# Altium PCB ALLPRINT-CAPBOARD-677512.PcbDoc (part 3 of 3)
Units mm, origin at the board's own origin, x right, y up, seen from the top; angles counter-clockwise.
Board outline 105 x 100 mm, 4 copper layers (Top Layer, Layer 1, Layer 2, Bottom Layer), stack 1.586 mm thick; 295 components, 219 nets, 882 pads, 764 vias.
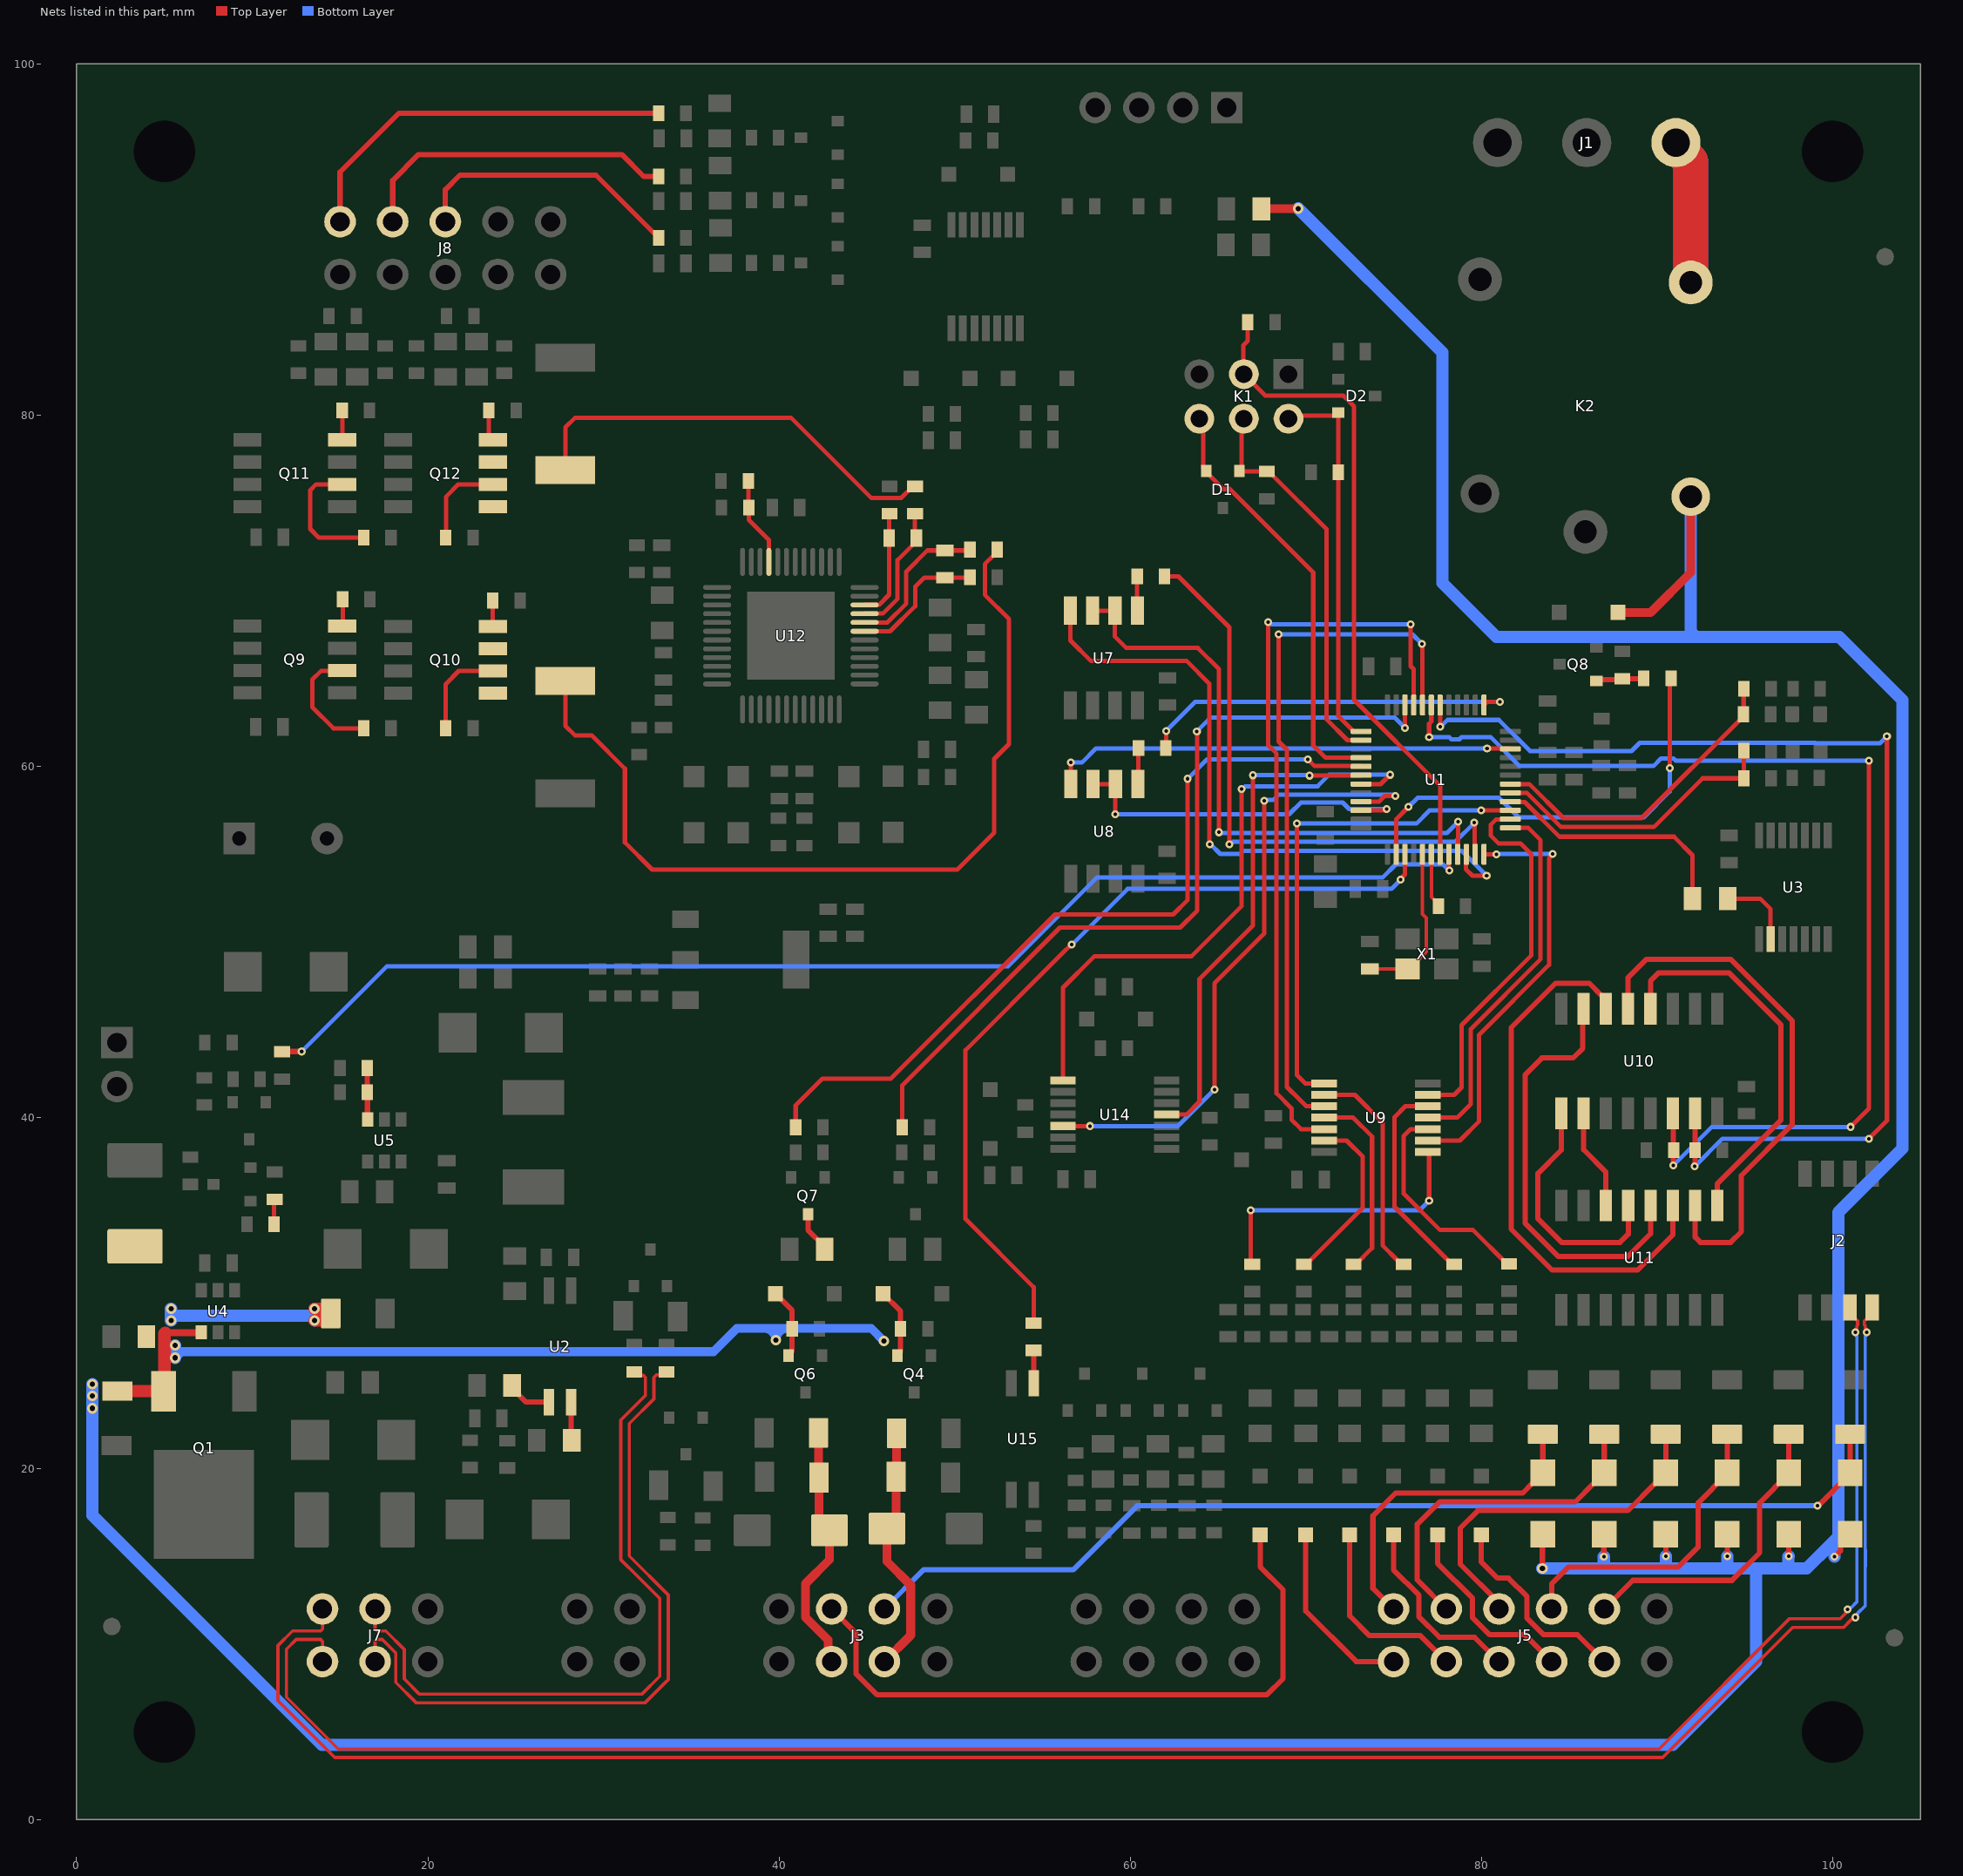
[diagram p5: the nets of this part, all layers, seen from the top]

## Via types
v1: diameter 0.45, hole 0.2, Top Layer to Bottom Layer, tented both sides, 591 vias
v2: diameter 0.6, hole 0.3, Top Layer to Bottom Layer, tented both sides, 173 vias

## Nets (pads, with @x,y where several pads share a name; then routed paths per layer and width w, separated by ;. In a path a pad name is that pad's centre, name@x,y a point inside that pad or via, vN(x,y) a via of type N, cw(c..) or ccw(c..) an arc to the next point about the centre after c; other vN are vias at no path point) (continued)
NetQ7_3: Q7.3 R41.2 | length 2.4
  Top Layer w0.3: Q7.3@41.65,34.475 41.65,33.575 42.6,32.625 R41.2@42.6,32.475
NetQ8_1: Q8.1 R44.2 R45.1 | length 2.8
  Top Layer w0.3: Q8.1@86.55,64.85 86.612,64.912 87.962,64.912 R45.1@88.025,64.975 89.225,64.975 R44.2@89.25,65
NetQ9_2: Q9.2 R62.2 | length 6.9
  Top Layer w0.25: Q9.2@15.125,65.44 15.11,65.425 13.925,65.425 13.425,64.925 13.425,63.35 14.625,62.15 R62.2@16.35,62.15
NetQ9_4: Q9.4 R63.1 | length 1.5
  Top Layer w0.25: Q9.4@15.125,67.98 15.15,68.005 R63.1@15.15,69.5
NetQ10_1: Q10.1 Q10.3 R72.2 R73.2 | length 51
  Top Layer w0.25: R73.2@27.831,64.85 27.831,62.294 28.375,61.75 29.325,61.75 31.225,59.85 31.225,55.65 32.775,54.1 50.15,54.1 52.25,56.2 52.25,60.4 53.1,61.25 53.1,68.375 51.725,69.75 51.725,71.5 52.225,72 52.425,72.2 R72.2@52.425,72.325
NetQ10_2: Q10.2 R70.2 | length 5.5
  Top Layer w0.25: R70.2@21.025,62.15 21.025,64.675 21.765,65.415 Q10.2@23.706,65.415
NetQ10_4: Q10.4 R71.1 | length 1.5
  Top Layer w0.25: R71.1@23.7,69.425 23.7,67.961 Q10.4@23.706,67.955
NetQ11_2: Q11.2 R79.2 | length 7.4
  Top Layer w0.25: Q11.2@15.125,76.04 13.64,76.04 13.3,75.7 13.3,73.5 13.8,73 R79.2@16.35,73
NetQ11_4: Q11.4 R80.1 | length 1.7
  Top Layer w0.25: Q11.4@15.125,78.58 R80.1@15.125,80.25
NetQ12_1: Q12.1 Q12.3 R87.2 R88.2 | length 24.7
  Top Layer w0.25: R88.2@27.831,76.85 27.831,79.281 28.375,79.825 40.7,79.825 45.25,75.275 46.971,75.275 47.621,75.925 R87.2@47.746,75.925
NetQ12_2: Q12.2 R85.2 | length 5.6
  Top Layer w0.25: R85.2@21.05,72.725 21.05,75.35 21.74,76.04 Q12.2@23.706,76.04
NetQ12_4: Q12.4 R86.1 | length 1.8
  Top Layer w0.25: R86.1@23.475,80.25 23.475,78.811 Q12.4@23.706,78.58
NetR3_1: R3.1 R6.2 U1.17 | length 16.8
  Top Layer w0.25: U1.17@81.65,58.475 82.589,58.475 84.539,56.525 89.825,56.525 92.6,59.3 R3.1@94.95,59.3 R6.2@94.95,60.875
NetR4_1: R4.1 R5.1 U1.18 | length 18.1
  Top Layer w0.25: U1.18@81.65,58.975 82.725,58.975 84.675,57.025 89.125,57.025 94.925,62.825 R5.1@94.925,62.95 94.938,62.963 94.938,64.388 R4.1@94.95,64.4
NetR16_1: R16.1 U2.1 | length 2.6
  Top Layer w0.3: R16.1@24.8,24.725 24.8,24.575 25.6,23.775 U2.1@26.89,23.775
NetR18_1: R18.1 U3.2 | length 4.4
  Top Layer w0.25: R18.1@94.025,52.45 95.875,52.45 96.475,51.85 U3.2@96.475,50.15
NetR18_2: R18.2 U1.16 | length 14.1
  Top Layer w0.25: U1.16@81.65,57.975 81.675,57.95 82.475,57.95 84.45,55.975 90.975,55.975 92.025,54.925 R18.2@92.025,52.45
NetR19_2: R19.2 U2.2 | length 2.2
  Top Layer w0.3: U2.2@28.16,23.775 28.16,21.64 R19.2@28.2,21.6
NetR22_1: R22.1 R24.2 U5.3 | length 2.9
  Top Layer w0.3: R22.1@16.55,42.8 R24.2@16.55,41.425 16.563,41.412 16.563,39.887 U5.3@16.575,39.875
NetR26_1: R26.1 R27.2 | length 1.4
  Top Layer w0.25: R27.2@11.25,33.9 11.25,35.3 R26.1@11.275,35.325
NetR28_1: R28.1 U1.8 | length 72
  Top Layer w0.25: U1.8@78.15,54.975 78.163,54.963 78.163,54.063 v1(78.175,54.05)
  Top Layer w0.3: R28.1@11.7,43.725 11.719,43.744 v1(12.815,43.744)
  Bottom Layer w0.25: v1(12.815,43.744) 17.672,48.6 53.05,48.6 58.1,53.65 74.375,53.65 75.125,54.4 77.825,54.4 v1(78.175,54.05)
NetR30_1: R30.1 U1.11 | length 33.5
  Top Layer w0.25: R30.1@61.95,70.8 62.75,70.8 65.65,67.9 v1(65.65,55.55) ; v1(79.6,56.775) 79.625,56.75 79.625,55 U1.11@79.65,54.975 U1.11@79.663,54.963
  Bottom Layer w0.25: v1(65.65,55.55) 65.704,55.55 65.854,55.7 78.525,55.7 v1(79.6,56.775)
NetR30_2: R30.2 U7.1 | length 2
  Top Layer w0.25: R30.2@60.4,70.8 60.4,68.855 U7.1@60.405,68.85
NetR32_1: R32.1 U1.25 | length 21.7
  Top Layer w0.25: R32.1@62.025,61.025 62.075,61.075 62.05,61.1 v1(62.05,62) ; U1.25@80.15,63.475 80.325,63.65 v1(81.05,63.65)
  Bottom Layer w0.25: v1(62.05,62) 63.7,63.65 v1(81.05,63.65)
NetR32_2: R32.2 U8.1 | length 2.1
  Top Layer w0.25: U8.1@60.43,58.975 60.475,59.02 R32.2@60.475,61.025
NetR37_2: R37.2 U1.34 | length 47.2
  Top Layer w0.25: R37.2@47.025,39.425 47.025,41.825 56,50.8 62.85,50.8 63.825,51.775 63.825,61.95 v1(63.8,61.975) ; v1(75.65,62.175) U1.34@75.65,63.475
  Bottom Layer w0.25: v1(63.8,61.975) 64.575,62.75 75.075,62.75 v1(75.65,62.175)
NetR42_2: R42.2 U1.41 | length 45.8
  Top Layer w0.25: R42.2@40.95,39.425 40.95,40.675 42.475,42.2 46.375,42.2 55.725,51.55 62.45,51.55 63.275,52.375 v1(63.275,59.275) ; v1(70.125,60.375) 70.5,60 73.125,60 U1.41@73.15,59.975
  Bottom Layer w0.25: v1(63.275,59.275) 64.375,60.375 v1(70.125,60.375)
NetR44_1: R44.1 U1.2 | length 25.6
  Top Layer w0.25: U1.2@75.15,54.975 75.15,56.975 v1(75.85,57.675) ; v1(90.725,59.875) 90.725,64.925 R44.1@90.8,65
  Bottom Layer w0.25: v1(75.85,57.675) 76.375,58.2 81,58.2 82.125,57.075 89.25,57.075 90.725,58.55 v1(90.725,59.875)
NetR47_2: R47.2 U9.1 | length 16.3
  Top Layer w0.25: v1(66.875,34.7) 66.875,31.705 R47.2@66.955,31.625 ; U9.1@76.95,38.025 77.025,37.95 v1(77.025,35.25)
  Bottom Layer w0.25: v1(66.875,34.7) 76.475,34.7 v1(77.025,35.25)
NetR49_2: R49.2 U9.3 | length 12.5
  Top Layer w0.25: U9.3@76.95,39.325 75.975,39.325 75.575,38.925 75.575,35.65 77.65,33.575 79.525,33.575 81.45,31.65 R49.2@81.575,31.65
NetR51_2: R51.2 U9.5 | length 12
  Top Layer w0.25: U9.5@76.95,40.625 75.675,40.625 75.05,40 75.05,34.9 78.325,31.625 R51.2@78.45,31.625
NetR53_2: R53.2 U9.9 | length 12.6
  Top Layer w0.25: U9.9@71.05,41.275 72.8,41.275 74.375,39.7 74.375,32.7 75.25,31.825 75.45,31.625 R53.2@75.575,31.625
NetR55_2: R55.2 U9.11 | length 11
  Top Layer w0.25: U9.11@71.05,39.975 72.7,39.975 73.775,38.9 73.775,32.55 72.85,31.625 R55.2@72.725,31.625
NetR57_2: R57.2 U9.13 | length 10.2
  Top Layer w0.25: R57.2@69.9,31.625 70.025,31.625 73.25,34.85 73.25,37.75 72.325,38.675 U9.13@71.05,38.675
NetR58_1: R58.1 U1.31 U10.14 | length 63.3
  Top Layer w0.25: v1(77.025,61.65) 77.025,62.403 77.15,62.528 U1.31@77.15,63.475 ; v1(101.025,39.45) 102.075,40.5 v1(102.075,60.3)
  Top Layer w0.3: U10.14@90.9,40.225 90.925,40.2 90.925,38.15 R58.1@90.95,38.125 90.937,38.113 90.937,37.262 v1(90.925,37.25)
  Bottom Layer w0.25: v1(77.025,61.65) 78.172,61.65 78.297,61.525 78.753,61.525 78.878,61.65 80.525,61.65 82.175,60 89.797,60 90.229,60.432 90.724,60.432 90.731,60.439 90.939,60.439 91.078,60.3 v1(102.075,60.3) ; v1(90.925,37.25) 93.125,39.45 v1(101.025,39.45)
NetR59_1: R59.1 U1.30 U10.15 | length 64.9
  Top Layer w0.25: v1(77.65,62.25) U1.30@77.65,63.475 ; v1(102.069,38.775) 103.1,39.806 v1(103.1,61.7)
  Top Layer w0.3: v1(92.15,37.2) 92.163,37.212 92.163,38.113 R59.1@92.175,38.125 92.173,38.128 92.173,40.223 U10.15@92.17,40.225
  Bottom Layer w0.25: v1(77.65,62.25) 77.696,62.25 78.071,62.625 81,62.625 82.775,60.85 88.55,60.85 89.025,61.325 99.016,61.325 99.054,61.288 102.688,61.288 v1(103.1,61.7) ; v1(92.15,37.2) 93.725,38.775 v1(102.069,38.775)
NetR61_1: R61.1 R64.2 U12.21 | length 5.1
  Top Layer w0.25: R61.1@38.25,76.225 38.263,76.213 38.263,74.738 R64.2@38.275,74.725 38.275,74.025 39.425,72.875 U12.21@39.425,71.625
NetR106_1: R106.1 U1.3 | length 47.5
  Top Layer w0.25: R106.1@54.5,28.275 54.5,30.325 50.625,34.2 50.625,43.822 55.803,49 56.125,49.322 56.628,49.825 v1(56.675,49.825) ; v1(75.4,53.525) 75.4,53.579 75.65,53.829 U1.3@75.65,54.975
  Bottom Layer w0.25: v1(56.675,49.825) 59.85,53 74.875,53 v1(75.4,53.525)
NetR106_2: R106.2 U15.1 | length 1.9
  Top Layer w0.3: U15.1@54.5,24.85 R106.2@54.5,26.725
NetU1_9: U1.9 U7.2 U7.3 | length 34.5
  Top Layer w0.25: U7.3@57.865,68.85 U7.2@59.135,68.85 59.135,67.365 59.775,66.725 63.85,66.725 65.05,65.525 v1(65.05,56.225) ; U1.9@78.65,54.975 78.675,55 v1(78.675,56.825)
  Bottom Layer w0.25: v1(65.05,56.225) 65.1,56.175 78.025,56.175 v1(78.675,56.825)
NetU1_10: U1.10 U7.4 | length 38.6
  Top Layer w0.25: U7.4@56.595,68.85 56.595,67.155 57.775,65.975 63.225,65.975 64.5,64.7 64.5,55.575 v1(64.525,55.55) ; U1.10@79.15,54.975 79.125,54.95 79.125,54.117 79.492,53.75 v1(80.3,53.75)
  Bottom Layer w0.25: v1(64.525,55.55) 64.575,55.55 65.125,55 66.275,55 66.45,55.175 78.875,55.175 v1(80.3,53.75)
NetU1_12: U1.12 U9.2 | length 24.2
  Top Layer w0.25: U9.2@76.95,38.675 78.775,38.675 79.875,39.775 79.875,44.7 83.85,48.675 83.85,54.3 83.85,54.746 84.05,54.946 v1(84.05,55) ; U1.12@80.15,54.975 v1(80.85,54.975)
  Bottom Layer w0.25: v1(80.85,54.975) 80.863,54.987 84.038,54.987 v1(84.05,55)
NetU1_13: U1.13 U9.4 | length 21.5
  Top Layer w0.25: U9.4@76.95,39.975 78.625,39.975 79.4,40.75 79.4,45.025 83.375,49 83.375,55.775 82.675,56.475 U1.13@81.65,56.475
NetU1_14: U1.14 U9.6 | length 21.7
  Top Layer w0.25: U9.6@76.95,41.275 78.45,41.275 78.875,41.7 78.875,45.25 82.85,49.225 82.85,54.975 82.225,55.6 80.975,55.6 80.525,56.05 80.525,56.65 80.825,56.95 81.625,56.95 U1.14@81.65,56.975
NetU1_15: U1.15 U9.8 | length 28.5
  Top Layer w0.25: v1(69.5,56.725) 69.5,42.4 69.975,41.925 U9.8@71.05,41.925 ; v1(80,57.475) U1.15@81.65,57.475
  Bottom Layer w0.25: v1(69.5,56.725) 76.3,56.725 77.05,57.475 v1(80,57.475)
NetU1_22: U1.22 U8.4 | length 26.6
  Top Layer w0.25: U8.4@56.62,58.975 56.625,58.98 v1(56.625,60.2) ; v1(80.325,61) 81.625,61 U1.22@81.65,60.975
  Bottom Layer w0.25: v1(56.625,60.2) 57.25,60.2 58.05,61 v1(80.325,61)
NetU1_32: U1.32 U9.10 | length 40.4
  Top Layer w0.25: v1(68.45,67.5) 68.45,61.4 68.925,60.925 68.925,41.725 69.65,41 70.025,40.625 U9.10@71.05,40.625 ; v1(76.625,66.95) 76.637,66.938 76.637,63.488 U1.32@76.65,63.475
  Bottom Layer w0.25: v1(68.45,67.5) 76.075,67.5 v1(76.625,66.95)
NetU1_33: U1.33 U9.12 | length 43.8
  Top Layer w0.25: v1(67.85,68.2) 67.85,61.2 68.338,60.713 68.338,41.363 69.2,40.5 69.2,39.85 69.725,39.325 U9.12@71.05,39.325 ; v1(75.975,68.075) 75.975,65.685 76.15,65.51 U1.33@76.15,63.475
  Bottom Layer w0.25: v1(67.85,68.2) 67.975,68.075 v1(75.975,68.075)
NetU1_42: U1.42 U14.4 | length 28.2
  Top Layer w0.25: U14.4@62.075,40.15 63.202,40.15 63.951,40.899 63.951,47.876 67,50.925 v1(67,59.475) ; v1(70.225,59.45) 70.237,59.462 73.138,59.462 U1.42@73.15,59.475
  Bottom Layer w0.25: v1(67,59.475) 70.2,59.475 v1(70.225,59.45)
NetU1_43: U1.43 U14.8 | length 34.7
  Top Layer w0.25: U14.8@56.175,42.1 56.175,47.375 57.975,49.175 63.5,49.175 66.35,52.025 v1(66.35,58.7) ; U1.43@73.15,58.975 73.163,58.963 74.263,58.963 v1(74.8,59.5)
  Bottom Layer w0.25: v1(66.35,58.7) 66.404,58.7 66.554,58.85 70.675,58.85 71.325,59.5 v1(74.8,59.5)
NetU1_45: U1.45 U14.12 | length 36.8
  Top Layer w0.25: U14.12@56.175,39.5 v1(57.7,39.5) ; v1(64.8,41.575) 64.8,47.625 67.625,50.45 v1(67.625,58.025) ; U1.45@73.15,57.975 74.173,57.975 74.498,58.3 v1(75.1,58.3)
  Bottom Layer w0.25: v1(57.7,39.5) 62.725,39.5 v1(64.8,41.575) ; v1(67.625,58.025) 67.663,58.063 68.152,58.063 68.464,58.375 74.971,58.375 75.046,58.3 v1(75.1,58.3)
NetU1_46: U1.46 U8.2 U8.3 | length 20.4
  Top Layer w0.25: U8.3@57.89,58.975 U8.2@59.16,58.975 59.15,58.965 v1(59.15,57.25) ; U1.46@73.15,57.475 74.471,57.475 74.546,57.55 v1(74.6,57.55)
  Bottom Layer w0.25: v1(59.15,57.25) 69.05,57.25 69.725,57.925 72.097,57.925 72.472,57.55 v1(74.6,57.55)
NetU10_4: U10.4 U11.1 | length 22.2
  Top Layer w0.3: U10.4@89.63,46.169 89.63,47.755 90.1,48.225 94.1,48.225 97.05,45.275 97.05,39.825 93.445,36.22 U11.1@93.445,34.972
NetU10_5: U10.5 U11.2 | length 31
  Top Layer w0.3: U10.5@88.36,46.169 88.36,47.96 89.4,49 94.2,49 97.7,45.5 97.7,39.575 94.8,36.675 94.8,33.475 94.2,32.875 92.475,32.875 92.175,33.175 U11.2@92.175,34.972
NetU10_6: U10.6 U11.3 | length 31.5
  Top Layer w0.3: U10.6@87.09,46.169 87.09,46.719 86.89,46.919 86.856,46.919 86.15,47.625 84.225,47.625 81.7,45.1 81.7,33.625 84.025,31.3 88.9,31.3 90.905,33.305 U11.3@90.905,34.972
NetU10_7: U10.7 U11.4 | length 24.7
  Top Layer w0.3: U10.7@85.82,46.169 85.775,46.124 85.775,43.925 85.225,43.375 83.45,43.375 82.5,42.425 82.5,33.95 84.375,32.075 88.35,32.075 89.635,33.36 U11.4@89.635,34.972
NetU10_9: U10.9 U11.5 | length 14.1
  Top Layer w0.3: U10.9@84.55,40.225 84.55,38.125 83.225,36.8 83.225,34.225 84.575,32.875 87.9,32.875 88.365,33.34 U11.5@88.365,34.972
NetU10_10: U10.10 U11.6 | length 5.8
  Top Layer w0.3: U10.10@85.82,40.225 85.82,38.155 87.095,36.88 U11.6@87.095,34.972
NF0: J1.1 K2.4 | length 16.6
  Top Layer w2: J1.1@91.08,95.5 91.08,95.284 91.925,94.439 K2.4@91.925,87.539
  Bottom Layer w2: J1.1@91.08,95.5 91.08,95.284 91.925,94.439 K2.4@91.925,87.539
O_RS485_N: J2.4 J7.6 | length 119.9
  Top Layer w0.184: J7.6@14,12 14,10.849 13.892,10.742 12.3,10.742 11.466,9.908 11.466,6.772 14.697,3.541 90.325,3.541 97.734,10.95 100.627,10.95 101.081,11.404 101.126,11.404 101.238,11.515 v1(101.31,11.515) ; v1(101.95,27.75) 101.899,27.801 101.899,27.959 101.867,27.991 101.867,28.114 101.812,28.169 101.812,28.399 101.919,28.507 101.966,28.507 102.255,28.796 J2.4@102.255,29.165
  Bottom Layer w0.184: v1(101.31,11.515) 101.31,11.587 101.421,11.699 101.421,11.744 101.867,12.19 101.867,14.425 101.876,14.434 101.876,15.366 101.867,15.375 101.867,27.509 101.899,27.541 101.899,27.699 v1(101.95,27.75)
O_RS485_P: J2.3 J7.3 | length 117.5
  Top Layer w0.184: J7.3@14,9 14,10.151 13.892,10.258 12.5,10.258 11.95,9.708 11.95,6.972 14.897,4.025 90.125,4.025 97.534,11.434 100.426,11.434 100.739,11.746 100.739,11.791 100.85,11.903 v1(100.85,11.975) ; J2.3@100.985,29.165 100.985,28.796 101.274,28.507 101.321,28.507 101.428,28.399 101.428,28.159 101.383,28.114 101.383,27.991 101.351,27.959 101.351,27.801 v1(101.3,27.75)
  Bottom Layer w0.184: v1(100.85,11.975) 100.922,11.975 101.034,12.086 101.079,12.086 101.383,12.391 101.383,14.625 101.392,14.634 101.392,15.166 101.383,15.175 101.383,27.509 101.351,27.541 101.351,27.699 v1(101.3,27.75)
OSC_IN: C10.2 U1.5 X1.1 | length 9.3
  Top Layer w0.2: C10.2@73.65,48.45 X1.1@75.8,48.45 75.9,48.45 76.875,49.425 76.875,51.35 76.65,51.575 U1.5@76.65,54.975
OSC_OUT: R8.2 U1.6 | length 3.1
  Top Layer w0.2: U1.6@77.15,54.975 77.15,52.55 77.55,52.15 R8.2@77.55,52.025
OUT_LED: D12.2 J3.3 PTC7.2 R40.2 | length 14.5
  Top Layer w0.5: PTC7.2@42.25,22.025 42.263,22.012 42.263,19.487 R40.2@42.275,19.475 42.275,17.075 D12.2@42.875,16.475 42.875,14.8 41.5,13.425 41.5,11.525 42.802,10.223 42.802,9.198 J3.3@43,9
OUT_SYNC: D10.2 J3.2 PTC6.2 R35.2 | length 14.4
  Top Layer w0.5: J3.2@46,9 47.5,10.5 47.5,13.35 46.15,14.7 D10.2@46.15,16.575 46.675,17.1 R35.2@46.675,19.525 46.688,19.538 46.688,21.987 PTC6.2@46.7,22
RS485_N: J7.2 PTC3.1 | length 40.5
  Top Layer w0.184: J7.2@17,9 17,10.151 17.108,10.258 17.404,10.258 18.176,9.487 18.176,7.815 19.333,6.658 32.384,6.658 33.55,7.825 33.692,7.966 33.692,12.792 31.475,15.009 31.475,22.55 32.878,23.953 32.878,25.185 33.024,25.332 33.432,25.332 PTC3.1@33.6,25.5
RS485_P: J7.5 PTC2.2 | length 39.6
  Top Layer w0.184: J7.5@17,12 17,10.849 17.108,10.742 17.605,10.742 18.659,9.687 18.659,8.016 18.7,7.975 19.533,7.142 32.183,7.142 33.208,8.167 33.208,12.592 31.929,13.871 30.991,14.809 30.991,22.75 32.394,24.153 32.394,25.185 32.287,25.293 31.957,25.293 PTC2.2@31.75,25.5
RST: K1.3 R14.1 U1.7 | length 37.8
  Top Layer w0.25: R14.1@66.7,85.4 66.7,84.225 66.45,83.975 66.45,82.345 67.695,81.1 72.132,81.1 72.75,80.482 72.75,63.775 77.65,58.875 U1.7@77.65,54.975
SM_ENC_A: J8.3 R78.1 | length 15.9
  Top Layer w0.3: J8.3@21,91 21,92.825 21.825,93.65 29.575,93.65 32.85,90.375 32.975,90.375 33.15,90.2 R78.1@33.15,90.075
SM_ENC_B: J8.2 R84.1 | length 18.6
  Top Layer w0.3: J8.2@18,91 18,93.35 19.475,94.825 31.05,94.825 32.3,93.575 R84.1@33.15,93.575
SM_ENC_Z: J8.1 R93.1 | length 22.4
  Top Layer w0.3: J8.1@15,91 15,93.825 18.35,97.175 R93.1@33.15,97.175
SRAH: C51.2 R72.1 U12.8 | length 8.8
  Top Layer w0.25: U12.8@44.875,68.175 46.175,68.175 47.25,69.25 47.25,71.075 48.45,72.275 C51.2@49.45,72.275 50.825,72.275 R72.1@50.875,72.325
SRAL: C51.1 R74.1 U12.7 | length 7.9
  Top Layer w0.25: U12.7@44.875,67.675 46.325,67.675 47.75,69.1 47.75,70.2 48.275,70.725 C51.1@49.45,70.725 50.85,70.725 R74.1@50.875,70.75
SRBH: C62.2 R87.1 U12.9 | length 7.6
  Top Layer w0.25: U12.9@44.875,68.675 44.881,68.681 45.906,68.681 46.75,69.525 46.75,71.729 47.821,72.8 C62.2@47.821,72.975 47.746,73.05 47.746,74.3 R87.1@47.671,74.375
SRBL: C62.1 R91.1 U12.10 | length 6.3
  Top Layer w0.25: U12.10@44.875,69.175 44.881,69.181 45.698,69.181 46.271,69.753 C62.1@46.271,72.975 46.271,74.325 R91.1@46.221,74.375
SWCLK: D1.1 K1.4 R15.2 U1.38 | length 22.7
  Top Layer w0.25: K1.4@66.475,79.78 66.35,79.655 66.35,76.925 D1.1@66.225,76.8 66.238,76.787 67.763,76.787 67.975,76.575 68.1,76.575 71.175,73.5 71.175,62.675 72.375,61.475 U1.38@73.15,61.475
SWDIO: D2.2 K1.2 R13.1 U1.37 | length 21.9
  Top Layer w0.25: K1.2@69.015,79.78 69.187,79.952 71.677,79.952 D2.2@71.85,80.125 71.862,80.112 71.862,62.838 72.725,61.975 U1.37@73.15,61.975
SWO: D1.2 K1.6 U1.40 | length 24.5
  Top Layer w0.25: K1.6@63.935,79.78 64.15,79.565 64.15,76.975 D1.2@64.325,76.8 64.325,76.75 65.3,75.775 65.675,75.775 70.425,71.025 70.425,61.175 71.125,60.475 U1.40@73.15,60.475
VSYS: C16.2 D9.2 D11.2 D13.2 D20.2 D21.2 D22.2 D23.2 D24.2 D25.2 F2.2 K2.1 PTC1.1 Q1.3 Q4.2 Q6.2 R10.2 R20.2 R34.2 R39.2 U4.4 | length 340.4
  Top Layer w0.3: D11.2@39.8,29.95 40.75,29 R39.2@40.75,27.95 40.75,26.675 40.55,26.475 Q6.2@40.55,26.425 ; D9.2@45.925,29.95 46.925,28.95 R34.2@46.925,27.95 46.925,26.65 46.75,26.475 Q4.2@46.75,26.425 ; v2(83.475,14.3) D25.2@83.475,16.225 ; v1(86.975,14.975) 86.975,16.225 D24.2@87,16.25 ; v1(90.5,15) D23.2@90.5,16.25 ; v1(94,15) D22.2@94,16.25 ; v1(97.5,15) D21.2@97.5,16.25 ; v1(100.117,14.975) 100.453,15.311 100.453,15.703 D20.2@101,16.25
  Top Layer w0.4: 5.05,27.725 5.063,27.738 7.087,27.738 U4.4@7.1,27.75
  Top Layer w0.5: R10.2@67.475,91.725 67.5,91.75 v2(69.575,91.75) ; D13.2@87.775,68.75 89.65,68.75 91.925,71.025 K2.1@91.925,75.339
  Top Layer w0.7: R20.2@2.325,24.4 Q1.3@4.95,24.4 5,24.45 5,27.675 5.05,27.725 ; F2.2@2.925,32.25 F2.2@3.325,32.65 ; v2(13.55,28.425) 14.275,28.425 14.475,28.625 PTC1.1@14.475,28.825 14.475,28.9 14.275,29.1 v2(13.55,29.1) ; D25.2@83.475,16.225 D25.2@83.5,16.25
  Bottom Layer w0.5: v2(5.6,26.303) 5.627,26.303 5.975,26.65 36.275,26.65 37.6,27.975 39.8,27.975 ; 39.15,27.975 cw(c39.15,27.3) v2(39.825,27.3) ; 40.925,27.975 40.5,27.975 ; v2(45.975,27.25) 45.25,27.975 40.5,27.975 ; 39.8,27.975 40.5,27.975 ; 39.8,27.975 39.806,27.969 39.806,27.319 v2(39.825,27.3) ; v2(39.825,27.3) cw(c40.5,27.3) 40.5,27.975
  Bottom Layer w0.7: v2(0.9,24.8) v2(0.9,24.125) v2(0.9,23.425) 0.9,17.325 13.975,4.25 90.9,4.25 95.65,9 95.65,14.3 ; v2(5.375,28.425) v2(5.375,29.1) ; v2(5.6,26.303) v2(5.6,27) ; 5.625,28.7 13.275,28.7 ; v2(13.55,28.425) v2(13.55,29.1) ; v2(69.575,91.75) 77.775,83.55 77.775,70.425 80.85,67.35 91.925,67.35 92.218,67.35 ; v2(83.475,14.3) 86.975,14.3 ; v1(86.975,14.975) 86.975,14.3 ; v1(90.5,15) 90.5,14.3 ; K2.1@91.925,75.339 91.925,67.643 92.218,67.35 ; v1(94,15) 94,14.3 ; v1(97.5,15) 97.475,14.975 97.475,14.325 97.45,14.3 ; v1(100.117,14.975) 100.117,15.308 99.825,15.6 ; 86.975,14.3 90.5,14.3 ; 90.5,14.3 94,14.3 ; 92.218,67.35 100.375,67.35 103.975,63.75 103.975,38.225 100.325,34.575 100.325,16.1 99.825,15.6 ; 94,14.3 95.65,14.3 ; 95.65,14.3 97.45,14.3 ; 97.45,14.3 98.525,14.3 99.825,15.6
X00: D14.2 J3.7 | length 38.2
  Top Layer w0.3: J3.7@43,12 44.385,10.615 44.385,8.315 45.6,7.1 67.775,7.1 68.7,8.025 68.7,13.1 67.4,14.4 D14.2@67.4,16.225
X01: D15.2 J5.2 | length 11.6
  Top Layer w0.3: D15.2@80,16.225 80,14.675 80.925,13.75 81.55,13.75 82.6,12.7 82.6,11.475 83.55,10.525 85.475,10.525 J5.2@87,9
X02: D16.2 J5.3 | length 11.1
  Top Layer w0.3: D16.2@77.5,16.225 77.5,14.6 79.5,12.6 79.5,11.5 80.475,10.525 82.475,10.525 J5.3@84,9
X03: D17.2 J5.4 | length 10.9
  Top Layer w0.3: D17.2@75,16.225 75,14.225 76.45,12.775 76.45,11.55 77.615,10.385 79.615,10.385 J5.4@81,9
X04: D18.2 J5.5 | length 11.2
  Top Layer w0.3: D18.2@72.5,16.225 72.5,11.6 73.625,10.475 76.525,10.475 J5.5@78,9
X05: D19.2 J5.6 | length 10.5
  Top Layer w0.3: D19.2@70,16.225 70,11.875 72.875,9 J5.6@75,9
Y00: D20.1 J3.6 PTC8.2 | length 60.4
  Top Layer w0.3: v1(99.15,17.875) 99.175,17.875 101,19.7 D20.1@101,19.75 PTC8.2@101,21.95
  Bottom Layer w0.3: J3.6@46,12 48.225,14.225 56.75,14.225 60.4,17.875 v1(99.15,17.875)
Y01: D21.1 J5.8 PTC9.2 | length 17.6
  Top Layer w0.3: J5.8@87,12 88.625,13.625 94.275,13.625 95.85,15.2 95.85,18.05 97.5,19.7 D21.1@97.5,19.75 PTC9.2@97.5,21.95
Y02: D22.1 J5.9 PTC10.2 | length 17.8
  Top Layer w0.3: J5.9@84,12 84,13.425 84.95,14.375 91.2,14.375 92.35,15.525 92.35,18.05 94,19.7 PTC10.2@94,21.95
Y03: D23.1 J5.10 PTC11.2 | length 20.7
  Top Layer w0.3: J5.10@81,12 81,12.35 78.8,14.55 78.8,16.6 79.8,17.6 88.35,17.6 89.9,19.15 89.95,19.15 90.5,19.7 D23.1@90.5,19.75 PTC11.2@90.5,21.95
Y04: D24.1 J5.11 PTC12.2 | length 19.6
  Top Layer w0.3: J5.11@78,12 76.35,13.65 76.35,16.825 77.625,18.1 85.35,18.1 86.4,19.15 86.45,19.15 87,19.7 PTC12.2@87,21.95
Y05: D25.1 J5.12 PTC13.2 | length 18.7
  Top Layer w0.3: J5.12@75,12 73.825,13.175 73.825,17.3 75.125,18.6 82.35,18.6 82.9,19.15 82.95,19.15 83.5,19.7 PTC13.2@83.5,21.95
pads on no net: FD1. FD2. FD3. U1.4 U3.4 U3.6 U3.8 U3.10 U3.12 U10.11 U10.12 U10.13 U11.9 U11.10 U12.17 U12.18 U12.26 U12.27

## Polygon pours and split planes (outlines as drawn)
GND on Top Layer "NONET_L01_P-001" (solid, remove dead copper, pour order 37): 32.262,51.662 29.375,54.55 29.375,58.884 29.816,59.325 31.55,59.325 31.55,87.425 29.775,89.2 12.4,89.2 10.775,87.575 10.775,80.3 10.35,79.875 -0.275,79.875 -0.9,80.5 -0.9,98.425 -1.175,98.7 1.25,101.125 104.425,101.125 104.425,-1.4 -0.9,-1.4 -0.9,13.2 -0.875,13.225 19,13.225 20.5,14.725 20.5,31.75 22.65,33.9 29.85,33.9 30.6,34.65 30.6,43.525 32.175,45.1 44.525,45.1 44.925,45.5 44.925,51.025 32.9,51.025
VSYS on Top Layer "NONET_L01_P-001" (solid, remove dead copper, pour order 32): 41.15,29.65 40.225,30.575 39.35,30.575 39.225,30.45 39.225,28.65 39.225,26.95 40.15,26.025 41,26.025 41.15,26.175
VSYS on Top Layer "NONET_L01_P-001" (solid, remove dead copper, pour order 31): 47.25,29.5 46.325,30.425 45.45,30.425 45.325,30.3 45.325,28.5 45.325,26.8 46.25,25.875 47.1,25.875 47.25,26.025
GND on Top Layer "NONET_L01_P-001" (solid, remove dead copper, pour order 14): 13.675,31.3 cw(c13.675,31.85) 13.125,31.85 13.125,41.325 cw(c13.7,41.325) 13.7,41.9 15.275,41.9 cw(c15.275,41.825) 15.35,41.825 15.35,40.15 ccw(c16.135,40.15) 15.58,39.595 16.025,39.15 ccw(c16.568,39.693) 16.568,38.925 20.05,38.925 ccw(c20.05,39.325) 20.45,39.325 20.45,50.25 cw(c20.85,50.25) 20.85,50.65 22.45,50.65 cw(c22.45,50.225) 22.875,50.225 22.875,41.05 cw(c21.427,41.05) 22.451,40.026 21,38.575 cw(c20.517,39.058) 20.517,38.375 16.15,38.375 ccw(c16.15,38.013) 15.894,38.269 15.45,37.825 ccw(c15.631,37.644) 15.375,37.644 15.375,37.35 ccw(c15.918,37.35) 15.534,36.966 15.925,36.575 cw(c15.02,35.67) 16.3,35.67 16.3,31.475 cw(c16.125,31.475) 16.125,31.3
3,3V on Top Layer "NONET_L01_P-001" (solid, remove dead copper, pour order 1): 83.3,60.475 83.3,62.425 83.35,62.475 84.95,62.475 85.525,63.05 87.275,63.05 87.4,62.925 87.4,62.425 87.3,62.325 86.4,62.325 85.775,61.7 85.775,60.475 85.7,60.4 83.375,60.4
GND on Top Layer "NONET_L01_P-001" (solid, remove dead copper, pour order 36): 83.277,58.798 84.775,57.3 88.9,57.3 89.25,57.65 89.25,58.625 89.025,58.85 86.675,58.85 85.982,59.543 83.364,59.543 83.277,59.455
3,3V on Top Layer "NONET_L01_P-001" (solid, remove dead copper, pour order 29): 74.425,53.9 74.65,53.9 74.65,53.675 74.675,53.65 74.675,52.675 74.05,52.675 74.05,53.5 73.6,53.95 70.475,53.95 70.375,54.05 70.375,56.025 70.517,56.167 73.158,56.167 73.75,55.575 73.75,54.575
GND on Top Layer "NONET_L01_P-001" (solid, remove dead copper, pour order 27): 42.825,51.35 41.85,51.35 cw(c41.85,51.75) 41.45,51.75 41.45,52.725 cw(c41.8,52.725) 41.8,53.075 45.375,53.075 cw(c45.375,52.85) 45.6,52.85 45.6,51.675 cw(c45.3,51.675) 45.3,51.375
3,3V on Top Layer "NONET_L01_P-001" (solid, remove dead copper, pour order 24): 37.273,46.777 ccw(c37.7,47.204) 37.7,46.6 44.75,46.6 ccw(c44.75,47.025) 45.175,47.025 45.175,50.5 ccw(c44.875,50.5) 44.875,50.8 38.375,50.8 ccw(c38.375,49.834) 37.692,50.517 37.1,49.925 cw(c36.496,50.529) 36.496,49.675 34.025,49.675 ccw(c34.025,49.475) 33.825,49.475 33.825,48.45 ccw(c34.15,48.45) 34.15,48.125 35.675,48.125 cw(c35.675,47.521) 36.102,47.948
GND on Top Layer "NONET_L01_P-001" (solid, remove dead copper, pour order 18): 31.301,48.025 29.312,48.025 cw(c29.312,48.658) 28.865,48.21 25.43,51.645 ccw(c27.53,53.745) 27.53,50.775 34.911,50.775 cw(c34.911,49.836) 35.575,50.5 33.925,50.5 ccw(c33.925,49.875) 33.3,49.875 33.3,48.35 cw(c32.975,48.35) 32.975,48.025
5V on Top Layer "NONET_L01_P-001" (solid, remove dead copper, pour order 17): 23.75,50.375 23.75,40.45 ccw(c24.225,40.45) 24.225,39.975 27.8,39.975 ccw(c27.8,40.35) 28.175,40.35 28.175,42.18 cw(c29.37,42.18) 28.525,43.025 30.427,44.927 cw(c31.75,43.604) 31.75,45.475 35.175,45.475 ccw(c35.175,46.025) 35.725,46.025 35.725,47.025 ccw(c35.35,47.025) 35.35,47.4 28.389,47.4 cw(c28.389,48.339) 27.725,47.675 25.049,50.351 ccw(c24.75,50.053) 24.75,50.475 23.85,50.475 ccw(c23.85,50.375)
GND on Top Layer "NONET_L01_P-001" (solid, remove dead copper, pour order 16): 20.523,82.723 20.375,82.575 17.225,82.575 17.075,82.723 11.981,82.723 ccw(c11.981,82.117) 11.375,82.117 11.375,75.825 11.375,47.5 ccw(c11.9,47.5) 11.9,46.975 17.725,46.975 ccw(c17.725,47.5) 18.25,47.5 18.25,51.675 cw(c18.7,51.675) 18.7,52.125 24.45,52.125 cw(c24.45,50.918) 25.304,51.771 26.035,51.04 ccw(c27.339,52.344) 27.339,50.5 35.55,50.5 ccw(c35.55,50.625) 35.675,50.625 35.675,52.05 ccw(c35.175,52.05) 35.175,52.55 33,52.55 cw(c33,53.938) 32.018,52.957 30.275,54.7 cw(c30.818,55.243) 30.05,55.243 30.05,59.05 ccw(c29.75,59.05) 29.75,59.35 17.177,59.35 cw(c17.177,61.89) 15.381,60.094 13.075,62.4 cw(c13.497,62.822) 12.9,62.822 12.9,79.3 cw(c14.65,79.3) 14.65,81.05 23.826,81.05 ccw(c23.822,83.341) 25.445,81.723 ccw(c25.102,82.141) 25.484,81.759 26.025,82.3 cw(c26.266,82.059) 26.266,82.4 30.85,82.4 ccw(c30.85,82.7) 31.15,82.7 31.15,85.225 ccw(c30.775,85.225) 30.775,85.6 28.15,85.6 ccw(c28.15,84.635) 27.467,85.317 25.175,83.025 cw(c24.446,83.754) 24.446,82.723
NetC19_1 on Top Layer "NONET_L01_P-001" (solid, remove dead copper, pour order 15): 18.875,37.875 ccw(c20.022,37.875) 19.211,37.064 19.8,36.475 ccw(c20.222,36.897) 20.222,36.3 22.388,36.3 ccw(c22.388,36.812) 22.75,36.45 23.198,36.898 cw(c23.625,36.471) 23.625,37.075 27.75,37.075 cw(c27.75,36.9) 27.925,36.9 27.925,34.975 cw(c27.825,34.975) 27.825,34.875 23.072,34.875 ccw(c23.072,34.278) 22.65,34.7 21.477,33.527 ccw(c21.904,33.1) 21.3,33.1 21.3,31.5 cw(c21.05,31.5) 21.05,31.25 19.05,31.25 cw(c19.05,31.475) 18.825,31.475 18.825,36.098 ccw(c18.398,36.098) 18.7,36.4 18.238,36.862 cw(c18.452,37.075) 18.15,37.075 18.15,37.85 cw(c18.225,37.85) 18.225,37.925 18.825,37.925 cw(c18.825,37.875)
+VM on Top Layer "NONET_L01_P-001" (solid, remove dead copper, pour order 4): 1.425,46.825 cw(c1.425,47.75) 0.5,47.75 0.5,78.4 cw(c1.425,78.4) 1.425,79.325 6.656,79.325 7.962,79.325 10.275,79.325 cw(c10.275,78.9) 10.7,78.9 10.7,47.125 cw(c10.4,47.125) 10.4,46.825
no net on Top Layer "NONET_L01_P-001" (solid, remove dead copper, pour order 35): 83.347,59.39
GND on Top Layer "NONET_L01_P-001" (solid, remove dead copper, pour order 30): 16.2,21.075 ccw(c17.05,21.075) 17.05,20.225 19.675,20.225 ccw(c19.675,20.6) 20.05,20.6 20.05,25.65 ccw(c19.7,25.65) 19.7,26 16.575,26 ccw(c16.575,25.625) 16.2,25.625
no net on Top Layer "NONET_L01_P-001" (solid, remove dead copper, pour order 28): 70.7,56.2
+VM on Top Layer "NONET_L01_P-001" (solid, remove dead copper, pour order 22): 1.7,36.225 cw(c1.7,36.7) 1.225,36.7 1.225,39.9 cw(c1.55,39.9) 1.55,40.225 5.025,40.225 cw(c5.025,39.825) 5.425,39.825 5.425,36.55 cw(c5.1,36.55) 5.1,36.225
GND on Top Layer "NONET_L01_P-001" (solid, remove dead copper, pour order 21): 0.275,28.825 cw(c0.65,28.825) 0.65,29.2 2.159,29.2 cw(c2.159,28.859) 2.4,29.1 2.65,28.85 cw(c2.288,28.488) 2.8,28.488 2.8,25.9 cw(c2.4,25.9) 2.4,25.5 0.525,25.5 cw(c0.525,25.75) 0.275,25.75
NetC17_2 on Top Layer "NONET_L01_P-001" (solid, remove dead copper, pour order 20): 9.522,22 ccw(c9.522,23.878) 10.85,22.55 13.653,25.353 cw(c14.25,24.755) 14.25,25.6 15.175,25.6 cw(c15.175,25.45) 15.325,25.45 15.325,14.2 cw(c14.825,14.2) 14.825,13.7 1.525,13.7 cw(c1.525,14.225) 1,14.225 1,21.525 cw(c1.475,21.525) 1.475,22
VSYS on Top Layer "NONET_L01_P-001" (solid, remove dead copper, pour order 19): 0.825,22.95 cw(c0.825,23.225) 0.55,23.225 0.55,25.05 cw(c0.75,25.05) 0.75,25.25 2.675,25.25 ccw(c2.675,25.95) 3.375,25.95 3.375,28.457 ccw(c2.607,28.457) 3.15,29 1.92,30.23 cw(c3.115,31.425) 1.425,31.425 1.425,33.4 cw(c1.95,33.4) 1.95,33.925 5.3,33.925 cw(c5.3,33.3) 5.925,33.3 5.925,23.25 cw(c5.625,23.25) 5.625,22.95
no net on Top Layer "NONET_L01_P-001" (solid, remove dead copper, pour order 13): 16.3,31.975
NetQ10_1 on Top Layer "NONET_L01_P-001" (solid, remove dead copper, pour order 3): 29.45,63.783 ccw(c29.45,64.033) 29.7,64.033 29.7,66.858 ccw(c29.5,66.858) 29.5,67.058 23.025,67.058 ccw(c23.025,66.933) 22.9,66.933 22.9,63.958 ccw(c23.075,63.958) 23.075,63.783
NetQ12_1 on Top Layer "NONET_L01_P-001" (solid, remove dead copper, pour order 2): 29.45,77.672 cw(c29.45,77.422) 29.7,77.422 29.7,74.597 cw(c29.5,74.597) 29.5,74.397 23.025,74.397 cw(c23.025,74.522) 22.9,74.522 22.9,77.497 cw(c23.075,77.497) 23.075,77.672
GND on Bottom Layer "NONET_L01_P-001" (solid, remove dead copper, pour order 39): -1.9,102 104.2,102 104.2,-2.05 -1.9,-2.05
3,3V on Bottom Layer "NONET_L01_P-001" (solid, remove dead copper, pour order 7): 56.65,23.425 58.325,21.75 65.325,21.75 65.325,22.9 64.05,24.175 56.65,24.175
no net on Bottom Layer "NONET_L01_P-001" (solid, remove dead copper, pour order 38): 83.25,59.525
+VM on Bottom Layer "NONET_L01_P-001" (solid, remove dead copper, pour order 33): 4.426,38.225 ccw(c4.426,39.249) 5.15,38.525 7.456,40.831 ccw(c5.66,42.627) 8.2,42.627 8.2,49.625 ccw(c7.75,49.625) 7.75,50.075 5.325,50.075 ccw(c5.325,49.65) 4.9,49.65 4.9,44.422 cw(c3.278,44.422) 4.425,43.275 1.409,40.259 ccw(c1.793,39.875) 1.25,39.875 1.25,38.35 ccw(c1.375,38.35) 1.375,38.225
no net on Bottom Layer "NONET_L01_P-001" (solid, remove dead copper, pour order 23): 18,91
GND on Layer 1 "NONET_L01_P-001" (solid, remove dead copper, pour order 25): -1.475,102.6 107.05,102.6 107.05,-1.875 -1.925,-1.875 -1.925,28.775
GND on Layer 2 "NONET_L01_P-001" (solid, remove dead copper, pour order 26): -1.475,102.6 107.05,102.6 107.05,-1.875 -1.925,-1.875 -1.925,28.775

## Keep-outs
Top Layer:
  lines w0.1: 27.825,60.825 28.3,61.3 29.139,61.3 30.775,59.664 30.775,55.464 32.589,53.65 50.336,53.65 52.7,56.014 52.7,60.214 53.55,61.064 53.55,68.561 52.606,69.506 ; 27.831,80.644 28.275,80.2 40.997,80.2 45.048,76.148 ; 45.125,76.475 47.075,76.475 47.075,75.825 ; 52.3,71.475 53.038,71.475 53.038,69.608
Keep-Out Layer:
  circle w0.3: c100,5 r5
  circle w0.3: c100,95 r5
  circle w0.3: c5,95 r5
  circle w0.3: c5,5 r5

## Other copper
Top Layer:
  region net GND: 13.65,33.1 14.725,33.1 14.725,31.975 13.65,31.975
  region net GND: 11.375,78.971 ccw(c10.471,78.971) 10.471,79.875 9.275,79.875 cw(c9.275,80.55) 8.6,80.55 8.6,82.725 cw(c9.05,82.725) 9.05,83.175 10.75,83.175 ccw(c11.205,83.175) 11.205,82.72 12.825,82.72 12.825,79.75 cw(c12.05,79.75) 12.05,78.975
  region net GND: 27.794,83.75 25.575,83.75 25.575,82.8 27.794,82.8
  region: 22.75,48.9
  region net GND: 22.05,48.375 21.325,48.375 21.325,47.6 22.05,47.6
  region net GND: 22.05,50.1 21.325,50.1 21.325,49.325 22.05,49.325
  region net GND: 22.125,50.45 21.15,50.45 21.15,50.65 22.475,50.65 22.475,46.9 22.125,46.9
  region net GND: 22.875,43.47 22.875,46.13 22.275,46.13 22.275,43.45 22.675,43.45 22.675,43.375
  region net GND: 20.45,43.225 21.075,43.225 21.075,46.225 20.45,46.225
  region net GND: 1.7,26.45 1.7,28.65 2.225,28.65 2.225,26.45
  region net GND: 1.825,26.65
  region net GND: 2.025,27.9 1.075,27.9 1.075,27.1 2.025,27.1
  region net GND: 27.825,57.95 30.044,57.95 30.044,58.9 27.825,58.9
  region net GND: 27.825,57.95 25.606,57.95 25.606,58.9 27.825,58.9
  region net GND: 28.981,58.45 28.981,57.2 26.506,57.2 26.506,58.45
  region net GND: 26.675,83.25 26.675,84.5 29.15,84.5 29.15,83.25
  region net GND: 27.831,83.75 30.05,83.75 30.05,82.8 27.831,82.8
  pour cut-out: 72.736,50.711 73.3,51.275 75.725,51.275 76.125,51.675 76.125,54.07 76.225,54.17 77.513,54.17 77.747,53.935 77.747,53 79.75,53 81.175,51.575 81.175,48.359 80.166,47.35 73.175,47.35 72.736,47.789
  pour cut-out: 77.6,75.075 81.725,70.95 90.325,70.95 94.475,75.1 94.475,100.35 77.6,100.35
  region net BMA2: 16.125,67.047 ccw(c16.125,67.397) 16.475,67.397 16.475,68.172 cw(c16.85,68.172) 16.85,68.547 19.15,68.547 cw(c19.15,68.397) 19.3,68.397 19.3,66.447 cw(c19.125,66.447) 19.125,66.272 14.45,66.272 cw(c14.45,66.347) 14.375,66.347 14.375,66.947 cw(c14.475,66.947) 14.475,67.047
  region net BMA1: 16.125,64.507 ccw(c16.125,64.857) 16.475,64.857 16.475,65.632 cw(c16.85,65.632) 16.85,66.007 19.15,66.007 cw(c19.15,65.857) 19.3,65.857 19.3,63.907 cw(c19.125,63.907) 19.125,63.732 14.45,63.732 cw(c14.45,63.807) 14.375,63.807 14.375,64.407 cw(c14.475,64.407) 14.475,64.507
  region net BMB1: 16.125,75.132 ccw(c16.125,75.482) 16.475,75.482 16.475,76.257 cw(c16.85,76.257) 16.85,76.632 19.15,76.632 cw(c19.15,76.482) 19.3,76.482 19.3,74.532 cw(c19.125,74.532) 19.125,74.357 14.45,74.357 cw(c14.45,74.432) 14.375,74.432 14.375,75.032 cw(c14.475,75.032) 14.475,75.132
  region net BMB2: 16.125,77.672 ccw(c16.125,78.022) 16.475,78.022 16.475,78.797 cw(c16.85,78.797) 16.85,79.172 19.15,79.172 cw(c19.15,79.022) 19.3,79.022 19.3,77.072 cw(c19.125,77.072) 19.125,76.897 14.45,76.897 cw(c14.45,76.972) 14.375,76.972 14.375,77.572 cw(c14.475,77.572) 14.475,77.672
Bottom Layer:
  region net NetF1_1: 19.45,16.525 23.975,12 23.975,7.825 22.975,7.825 22.975,9.55 21.55,10.975 19.675,10.975 19,11.65 19,15.575 18.375,16.2 18.8,16.625
  region net VSYS: 100.675,13.525 95.475,8.325 95.3,8.5 95.3,13.025 94.375,13.95 83.264,13.95 82.914,14.3 82.914,14.889 83.425,15.4 98.475,15.4 100,16.925 100.675,16.925
  region net 3,3V: 38.65,88.425 38.65,95.325 40.7,97.375 46.6,97.375 48.137,95.838 50.625,93.35 66.175,93.35 76.775,82.75 76.775,77.925 76.425,77.575 75.775,77.575 75.65,77.7 76.1,78.15 76.1,81.35 73.65,83.8 70.775,86.675 65.85,91.6 55.325,91.6 54.225,92.7 48.1,92.7 45.425,95.375 42.3,95.375 40.9,93.975 40.9,89.275 33.225,81.6 33.225,77.6 33.775,77.05 38.475,77.05 40.275,75.25 40.275,73.15 41.35,72.075 50.9,72.075 54.575,68.4 54.575,52.75 51.175,49.35 42.925,49.35 42.725,49.55 42.725,50.075 43.3,50.65 50.375,50.65 53.7,53.975 53.7,68.075 50.375,71.4 40.925,71.4 37,75.325 33.9,75.325 32.425,76.8 32.425,82.2
  region net 3,3V: 55.088,24.988 56.65,23.425 63.25,23.425 65.85,20.85 80.125,20.85 80.3,21.025 80.3,21.95 79.525,22.725 66.7,22.725 65.175,24.25 57.275,24.25 51.325,30.2 25.95,30.2 25.45,30.7 25.45,33.05 26.225,33.825 63.85,33.825 64.875,32.8 65.425,32.8 65.425,33.3 62.875,35.85 45.225,35.85 42.825,38.25 42.825,46.525 43.075,46.775 43.075,47.275 42.825,47.525 42.3,47.525 41.65,46.875 41.65,35.85 40.8,35 24.05,35 23.325,34.275 23.325,30.425 24.625,29.125 50.95,29.125
  region net 3,3V: 71.225,54.125 73.575,54.125 ccw(c73.575,54.3) 73.75,54.3 73.75,54.61 ccw(c73.552,54.61) 73.552,54.808 72.299,54.808 ccw(c72.299,54.381) 71.997,54.683 cw(c71.615,55.065) 71.615,54.525 71.225,54.525
  region net BMB1: 16.025,75.537 16.025,74.775 ccw(c16.45,74.775) 16.149,74.474 ccw(c16.45,74.775) 16.45,74.35 18,74.35 ccw(c18,76.775) 19.715,75.06 19.732,75.078 ccw(c18.06,76.75) 20.425,76.75 20.425,78.714 cw(c21.961,78.714) 20.875,79.8 24.375,83.3 ccw(c22.625,85.05) 25.1,85.05 25.1,88.425 ccw(c24.425,88.425) 24.902,88.902 24.885,88.92 ccw(c24.45,88.485) 24.45,89.1 23.725,89.1 ccw(c23.725,88.2) 23.089,88.836 ccw(c23.725,88.2) 22.825,88.2 22.825,85.452 cw(c20.285,85.452) 22.081,83.656 18.966,80.541 ccw(c20.331,79.175) 18.4,79.175 18.4,77 cw(c18.025,77) 18.29,76.735 cw(c18.025,77) 18.025,76.625 16.35,76.625 ccw(c16.35,76.3) 16.12,76.53 ccw(c16.35,76.3) 16.025,76.3 16.025,76.25
  region net BMB2: 17.775,76.875 ccw(c17.775,77.175) 18.075,77.175 18.075,79.073 cw(c20.615,79.073) 18.819,80.869 21.381,83.431 ccw(c19.585,85.227) 22.125,85.227 22.125,88.375 ccw(c21.35,88.375) 21.898,88.923 ccw(c21.35,88.375) 21.35,89.15 20.7,89.15 ccw(c20.7,88.3) 20.099,88.901 ccw(c20.7,88.3) 19.85,88.3 19.85,85.902 cw(c17.31,85.902) 19.106,84.106 16.719,81.719 ccw(c18.515,79.923) 15.975,79.923 15.975,77.175 ccw(c16.275,77.175) 16.063,76.963 ccw(c16.275,77.175) 16.275,76.875
  region net BMA2: 16.346,85.371 ccw(c15.493,86.225) 16.7,86.225 16.7,88.725 cw(c17.2,88.725) 16.846,89.079 cw(c17.2,88.725) 17.2,89.225 18.475,89.225 cw(c18.475,88.575) 18.935,89.035 18.988,88.982 cw(c18.656,88.65) 19.125,88.65 19.125,86.23 cw(c16.82,86.23) 18.45,84.6 16.044,82.194 ccw(c17.84,80.398) 15.3,80.398 15.3,69.175 ccw(c15.775,69.175) 15.439,68.839 ccw(c15.775,69.175) 15.775,68.7 17.375,68.7 cw(c17.375,68.375) 17.605,68.605 cw(c17.375,68.375) 17.7,68.375 17.7,66.65 cw(c17.325,66.65) 17.59,66.385 17.572,66.367 cw(c17.35,66.59) 17.35,66.275 14.275,66.275 cw(c14.275,67.3) 13.55,66.575 cw(c14.275,67.3) 13.25,67.3 13.25,81.391 cw(c15.384,81.391) 13.875,82.9
  region net BMA1: 17.7,65.75 ccw(c17.45,65.75) 17.627,65.927 ccw(c17.45,65.75) 17.45,66 14.075,66 cw(c14.075,67.225) 13.209,66.359 cw(c14.075,67.225) 12.85,67.225 12.85,81.398 cw(c15.39,81.398) 13.594,83.194 15.904,85.504 ccw(c15.008,86.4) 16.275,86.4 16.275,88.775 ccw(c15.8,88.775) 15.8,89.25 14.35,89.25 ccw(c14.35,88.65) 13.75,88.65 13.75,86.955 cw(c12.47,86.955) 13.375,86.05 11.389,84.064 ccw(c12.328,83.125) 11,83.125 11,65.415 ccw(c12.715,65.415) 11.502,64.202 ccw(c12.775,65.475) 12.775,63.675 17.35,63.675 ccw(c17.35,64.025) 17.597,63.778 ccw(c17.35,64.025) 17.7,64.025
  pour cut-out: 24.706,83.106 ccw(c22.91,84.902) 25.45,84.902 25.45,88.742 ccw(c24.742,88.742) 24.742,89.45 13.869,89.45 ccw(c13.869,88.881) 13.3,88.881 13.3,87.275 cw(c11.912,87.275) 12.893,86.293 11.319,84.719 ccw(c13.115,82.923) 10.575,82.923 10.575,65.25 ccw(c12.475,65.25) 12.475,63.35 17.775,63.35 ccw(c17.775,63.75) 18.175,63.75 18.175,71.898 cw(c20.715,71.898) 18.919,73.694 20.006,74.781 ccw(c18.21,76.577) 20.75,76.577 20.75,78.098 cw(c23.29,78.098) 21.494,79.894
  pour cut-out: 77.575,70.958 77.575,100.35 94.625,100.35 94.625,70.992

## Silkscreen, mask and mechanical layers (free items; w line width, h text height)
Top Overlay:
  lines w0.1: 55.975,20.4 55.6,20.775 55.6,26.525 56.375,27.375 ; 56.375,29.2 56.375,27.375 ; 64.4,29.2 64.4,27.375 56.375,27.375
  text "RUN" at 100.275,62.538 h1.1
  text "POWER" at 100.275,60.563 h1.1
Mechanical 1:
  lines w1: 82.925,76.525 82.925,71.525 83.925,70.525 85.925,70.525 87.925,70.525 88.925,71.525 88.925,76.525
Board:
  the board outline again, w0.3

## Text inside footprints (layer, text, board x,y; h text height)
J2: Top Overlay "ON" at 98.245,34.499 h0.51 r270; Top Overlay "ON" at 102.055,34.499 h0.51 r270; Top Overlay "ON" at 100.785,34.499 h0.51 r270; Top Overlay "ON" at 99.515,34.499 h0.51 r270